# Altium PCB PCB1_on_hydrolib.PcbDoc
Units mil, origin at the board's own origin, x right, y up, seen from the top; angles counter-clockwise.
Board outline 6000 x 4000 mil, 2 copper layers (Top Layer, Bottom Layer); 39 components, 19 nets, 112 pads, 0 vias.
Unrouted connection lines stored in the file: 85.
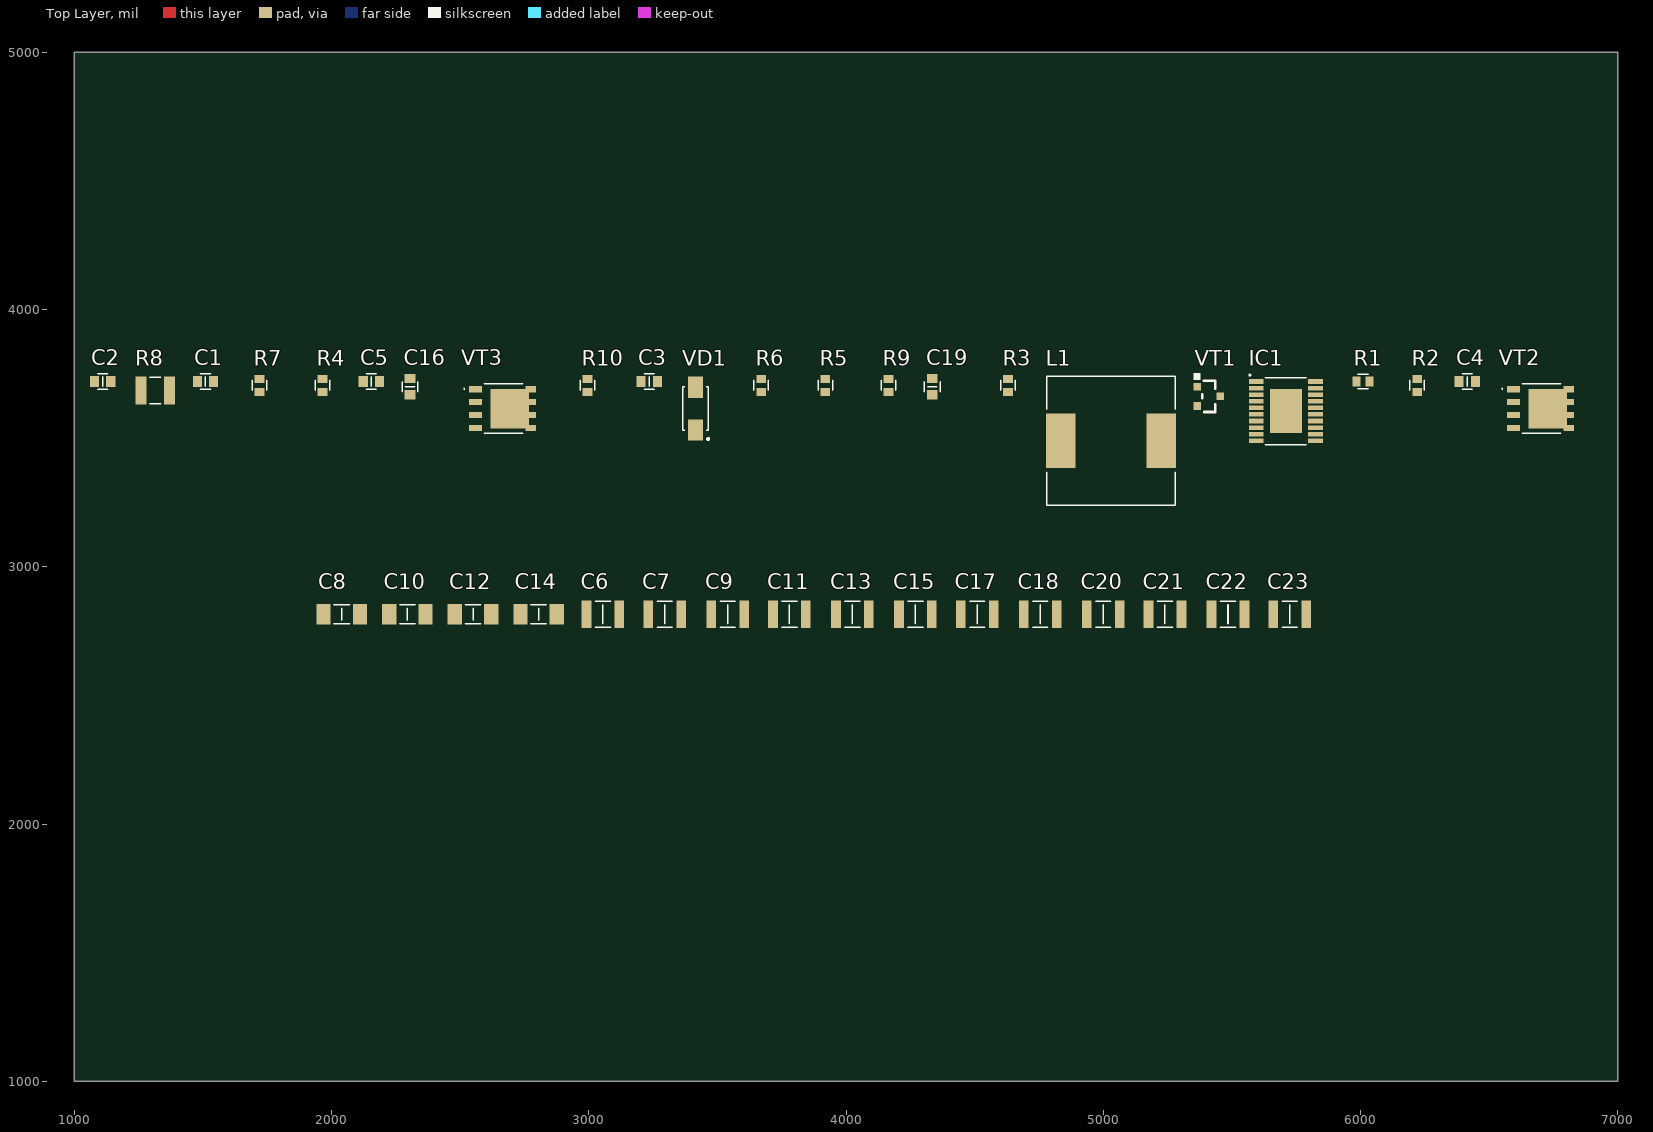
[diagram p0: Top Layer view]
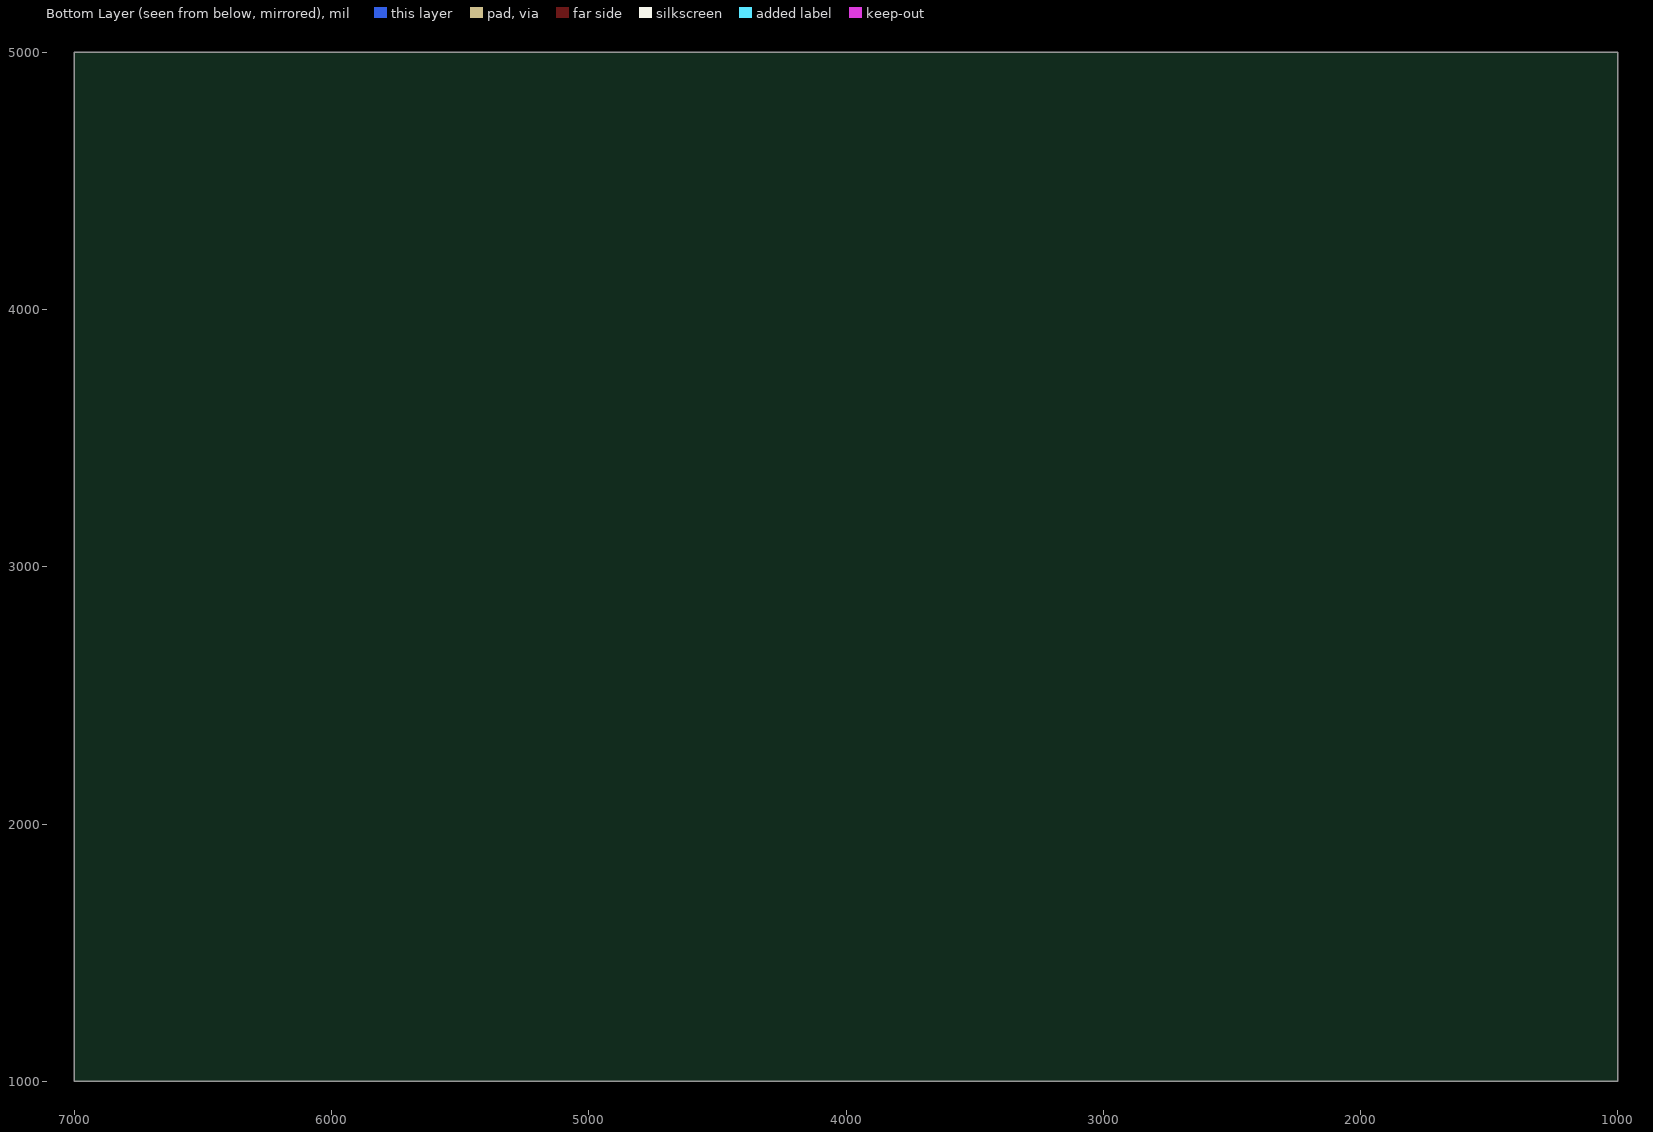
[diagram p1: Bottom Layer view, seen from below]

## Layer stack, top to bottom
Top Solder: solder mask 0.4, Solder Resist, Dk 3.5
Top Layer: signal copper 1.4
Dielectric 1: dielectric 12.6, FR-4, Dk 4.8
Bottom Layer: signal copper 1.4
Bottom Solder: solder mask 0.4, Solder Resist, Dk 3.5

## Board outline
1000,1000 7000,1000 7000,5000 1000,5000

## Design rules (kind name [scope] priority, off if disabled: settings)
Clearance [All] p1: gap=10 ignorepadtopadclearanceinfootprint=FALSE except(0: Arc-Hole Track-Hole SMDPad-Hole THPad-Hole Via-Hole Fill-Hole Poly-Hole Region-Hole Text-Hole)
PolygonConnect [All] p1: connectstyle=Relief reliefconductorwidth=10 reliefentries=4 polygonreliefangle="90 Angle" airgapwidth=10
RoutingVias [All] p1: holewidth=28 width=50 viastyle="Through Hole" minholewidth=28 minwidth=50 maxholewidth=28 maxwidth=50
SolderMaskExpansion [All] p1: expansion=4 istentingtop=FALSE
Width [All] p1: maxlimit=10 minlimit=10 preferedwidth=10
30 further rules are at their usual default settings.

## Components (designator, comment, footprint, x,y, rotation, side; value= is the part's Value field where it differs from the comment)
C1 "Capacitor" 0603C 1510,3720 r0 top value="0,01 н"
C2 "Capacitor" 0603C 1110,3720 r0 top value="0,15 н"
C3 "Capacitor" 0603C 3235,3720 r0 top value="0,75 н"
C4 "Capacitor" 0603C 6415,3720 r0 top value="0,1 мк"
C5 "Capacitor" 0603C 2155,3720 r0 top value="10 н"
C6 "Capacitor" 1210C 3055,2815 r0 top value="22 мк"
C7 "Capacitor" 1210C 3295,2815 r0 top value="22 мк"
C8 "Capacitor" 1206C 2040,2815 r0 top value="2,2 мк"
C9 "Capacitor" 1210C 3540,2815 r0 top value="22 мк"
C10 "Capacitor" 1206C 2295,2815 r0 top value="2,2 мк"
C11 "Capacitor" 1210C 3780,2815 r0 top value="22 мк"
C12 "Capacitor" 1206C 2550,2815 r0 top value="2,2 мк"
C13 "Capacitor" 1210C 4025,2815 r0 top value="22 мк"
C14 "Capacitor" 1206C 2805,2815 r0 top value="2,2 мк"
C15 "Capacitor" 1210C 4270,2815 r0 top value="22 мк"
C16 "Capacitor" 0603C 2305,3700 r90 top value="1 мк"
C17 "Capacitor" 1210C 4510,2815 r0 top value="22 мк"
C18 "Capacitor" 1210C 4755,2815 r0 top value="22 мк"
C19 "Capacitor" 0603C 4335,3700 r90 top value="1 мк"
C20 "Capacitor" 1210C 5000,2815 r0 top value="22 мк"
C21 "Capacitor" 1210C 5240,2815 r0 top value="22 мк"
C22 "Capacitor" 1210C 5485,2815 r0 top value="22 мк"
C23 "Capacitor" 1210C 5725,2815 r0 top value="22 мк"
IC1 "LM5116MH" HTSSOP-20 5710,3605 r0 top
L1 "CDSPRH127-150M" SPRH127 5020,3495 r0 top value="15 мк"
R1 "Resistor" 0603R 6010,3720 r0 top value=N/A
R2 "Resistor" 0603R 6220,3705 r90 top value="33 к"
R3 "Resistor" 0603R 4630,3705 r90 top value="2,7 к"
R4 "Resistor" 0603R 1965,3705 r90 top value="180 к"
R5 "Resistor" 0603R 3920,3705 r90 top value="12,4 к"
R6 "Resistor" 0603R 3670,3705 r90 top value="470 к"
R7 "Resistor" 0603R 1720,3705 r90 top value="10 к"
R8 "Resistor" 1210R 1315,3685 r0 top value="10 м"
R9 "Resistor" 0603R 4165,3705 r90 top value="10,7 к"
R10 "Resistor" 0603R 2995,3705 r90 top value="1,21 к"
VD1 "ES1D-E3/61T" SMA 3415,3615 r90 top
VT1 "PDTC114ET" SOT23-3 5365,3700 r0 top
VT2 "SIR426DP-T1-GE3" PowerPAK_SO-8 6695,3615 r0 top
VT3 "SIR426DP-T1-GE3" PowerPAK_SO-8 2660,3615 r0 top

## Footprints (in the part's own frame and the unit in brackets; to place one, negate y for a bottom-side part, rotate by r counter-clockwise, add the part's x,y. Pads: shape width x height; smd on the part's side, far side on the other; paste and mask are expansions set on the pad)
0603C [mm] "Chip Resistor, 2-Leads, Body 1,40x0,80mm, IPC Medium Density"
  rect 0.9x1.05 smd: 1(-0.8,0) 2(0.8,0)
  silkscreen extent -0.5,-0.77 0.5,0.77, body extent -0.85,-0.45 0.85,0.45, height 0.9
0603R [mm] "Chip Resistor, 2-Leads, Body 1.60x0.85mm, IPC Medium Density"
  rect 0.8x0.95 smd: 1(-0.65,0) 2(0.65,0)
  silkscreen extent -0.5,-0.72 0.5,0.72, body extent -0.87,-0.47 0.88,0.48, height 0.9
1206C [mm]
  rect 1.4x2 smd paste+0: 1(-1.8,0) 2(1.8,0)
  silkscreen extent -0.77,-0.92 0.77,0.92, body extent -1.6,-0.74 1.6,0.86, height 1.59
1210C [mm]
  rect 0.954x2.706 smd paste+0: 1(-1.625,0) 2(1.625,0)
  silkscreen extent -0.75,-1.28 0.75,1.28, body extent -2.35,-1.6 2.35,1.6, height 0.25
1210R [mm]
  rect 1.1x2.77 smd: 1(-1.413,0) 2(1.413,0)
  silkscreen extent -0.55,-1.3 0.55,1.3, body extent -1.55,-1.3 1.55,1.3, height 0.65
HTSSOP-20 [mm]
  rect 1.45x0.45 smd: 1(-2.925,2.925) 2(-2.925,2.275) 3(-2.925,1.625) 4(-2.925,0.975) 5(-2.925,0.325) 6(-2.925,-0.325) 7(-2.925,-0.975) 8(-2.925,-1.625) 9(-2.925,-2.275) 10(-2.925,-2.925) 11(2.925,-2.925) 12(2.925,-2.275) 13(2.925,-1.625) 14(2.925,-0.975) 15(2.925,-0.325) 16(2.925,0.325) 17(2.925,0.975) 18(2.925,1.625) 19(2.925,2.275) 20(2.925,2.925)
  rect 3.15x4.35 smd: 21(0,0)
  silkscreen extent -3.61,-3.3 2.03,3.61, body extent -3.21,-3.25 3.21,3.25, height 1
PowerPAK_SO-8 [mm]
  rect 1.27x0.61 smd: 1(-2.543,1.905) 2(-2.543,0.635) 3(-2.543,-0.635) 4(-2.543,-1.905)
  rect 1.02x0.61 smd: 5(2.921,-1.905) 8(2.921,1.905)
  rect 0.71x0.61 smd: 6(3.077,-0.635) 7(3.077,0.635)
  rect 3.81x3.91 smd: 9(0.83,0)
  silkscreen extent -3.72,-2.45 2.13,2.45, body extent -2.95,-2.58 3.2,2.58, height 1.12
SMA [mm]
  rect 2.12x1.5 smd: 1(2.115,0) 2(-2.115,0)
  silkscreen extent -3.1,-1.35 2.16,1.28, body extent -2.57,-1.28 2.57,1.28, height 2.5
SOT23-3 [mil]
  rect 30x30 smd: 1(0,0) 2(0,-75) 3(90,-37.5)
  silkscreen extent -13,-98 70,52, body extent -4,-97 94,21, height 41
SPRH127 [mm]
  rect 2.9x5.4 smd: 1(-4.696,-0.127) 2(5.204,-0.127)
  silkscreen extent -6.1,-6.48 6.6,6.22, body extent -5.75,-6.13 6.25,5.87, height 8.05

## Part data
C1: library part Capacitor_0,01n_10_50V_X7R_0603C, "Конденсатор", Capacity (nF)=0,01, Dielectric=X7R, Tolerance=0,1, Voltage (V)=50, Library Path2=Schematic\Capacitor.SchLib, Part Number=Capacitor_0,01n_10_50V_X7R_0603C
C2: library part Capacitor_0,15n_10_50V_X7R_0603C, "Конденсатор", Capacity (nF)=0,15, Dielectric=X7R, Tolerance=0,1, Voltage (V)=50, Library Path2=Schematic\Capacitor.SchLib, Part Number=Capacitor_0,15n_10_50V_X7R_0603C
C3: library part Capacitor_0,75n_10_50V_X7R_0603C, "Конденсатор", Capacity (nF)=0,75, Dielectric=X7R, Tolerance=0,1, Voltage (V)=50, Library Path2=Schematic\Capacitor.SchLib, Part Number=Capacitor_0,75n_10_50V_X7R_0603C
C4: library part Capacitor_0,1u_10_50V_X7R_0603C, "Конденсатор", Capacity (nF)=100, Dielectric=X7R, Tolerance=0,1, Voltage (V)=50, Library Path2=Schematic\Capacitor.SchLib, Part Number=Capacitor_0,1u_10_50V_X7R_0603C
C5: library part Capacitor_10n_10_50V_X7R_0603C, "Конденсатор", Capacity (nF)=10, Dielectric=X7R, Tolerance=0,1, Voltage (V)=50, Library Path2=Schematic\Capacitor.SchLib, Part Number=Capacitor_10n_10_50V_X7R_0603C
C6 C7 C9 C11 C13 C15 C17 C18 C20 C21 C22 C23: library part Capacitor_22u_10_25V_X7R_1210C, "Конденсатор", Capacity (nF)=22000, Dielectric=X7R, Tolerance=0,1, Voltage (V)=25, Library Path2=Schematic\Capacitor.SchLib, Part Number=Capacitor_22u_10_25V_X7R_1210C
C8 C10 C12 C14: library part Capacitor_2,2u_10_50V_X7R_1206C, "Конденсатор", Capacity (nF)=2200, Dielectric=X7R, Tolerance=0,1, Voltage (V)=50, Library Path2=Schematic\Capacitor.SchLib, Part Number=Capacitor_2,2u_10_50V_X7R_1206C
C16 C19: library part Capacitor_1u_10_50V_X7R_0603C, "Конденсатор", Capacity (nF)=1000, Dielectric=X7R, Tolerance=0,1, Voltage (V)=50, Library Path2=Schematic\Capacitor.SchLib, Part Number=Capacitor_1u_10_50V_X7R_0603C
IC1: "dc-dc понижающий adj 6-100v", Manufacturer_Part_Number=LM5116MH/NOPB, Part Number=LM5116MH
L1: "Индуктивность на 15 мкГн, номинальный ток 8,4 А", Current (A)=8,4, Inductance (μH)=15, Part Number=CDSPRH127-150M
R1: library part res_0603_N/A, "посадочное место 0603 под перемычку", Tolerance=1%, Part Number=res_0603_N/A
R2: library part Resistor_33k_1_0603, "Резистор номиналом 33 кОм и точностью 1%", Tolerance=1%, Part Number=Resistor_33k_1_0603
R3: library part Resistor_2.7k_1_0603, "Резистор номиналом 2,7 кОм и точностью 1%", Tolerance=1%, Part Number=Resistor_2.7k_1_0603
R4: library part Resistor_180k_1_0603, "Резистор номиналом 180 кОм и точностью 1%", Tolerance=1%, Part Number=Resistor_180k_1_0603
R5: library part Resistor_12.4k_1_0603, "Резистор номиналом 12,4 кОм и точностью 1%", Tolerance=1%, Part Number=Resistor_12.4k_1_0603
R6: library part Resistor_470k_1_0603, "Резистор номиналом 470 кОм и точностью 1%", Tolerance=1%, Part Number=Resistor_470k_1_0603
R7: library part Resistor_10k_1_0603, "Резистор номиналом 10 кОм и точностью 1%", Tolerance=1%, Part Number=Resistor_10k_1_0603
R8: library part RL1210FR-070R01L, "Резистор номиналом 10 мОм, точностью 1%, 0.5Вт", Tolerance=1%, Part Number=RL1210FR-070R01L
R9: library part Resistor_10.7k_1_0603, "Резистор номиналом 10,7 кОм и точностью 1%", Tolerance=1%, Part Number=Resistor_10.7k_1_0603
R10: library part Resistor_1.21k_1_0603, "Резистор номиналом 1,21 кОм и точностью 1%", Tolerance=1%, Part Number=Resistor_1.21k_1_0603
VD1: "Диод 1A 200V", Current (A)=1, Repetitive peak reverse voltage (Vrrm)=200, Part Number=ES1D-E3/61T
VT1: "цифровой npn 50в 100мА", Part Number=PDTC114ET, Напряжение С-И/К-Э="50 В", Ток макс#="0, 1 А"
VT2 VT3: "Транзистор полевой MOSFET N-канальный 40В 41.7Вт", Part Number=SIR426DP-T1-GE3, Напряжение С-И/К-Э="40 В"

## Nets (pads, with @x,y where several pads share a name; then routed paths per layer and width w, separated by ;. In a path a pad name is that pad's centre, name@x,y a point inside that pad or via, vN(x,y) a via of type N, cw(c..) or ccw(c..) an arc to the next point about the centre after c; other vN are vias at no path point)
FB: C1.2 IC1.8 R4.2 R9.1 R10.2
GND: C3.1 C4.1 C5.1 C6.1 C7.1 C8.1 C9.1 C10.1 C11.1 C12.1 C13.1 C14.1 C15.1 C16.2 C17.1 C18.1 C20.1 C21.1 C22.1 C23.1 IC1.6 IC1.12 IC1.14 IC1.17 IC1.21 R3.1 R5.1 R7.2 R8.1 R10.1 VT1.2
NetC1_1: C1.1 C2.1 IC1.9
NetC2_2: C2.2 R4.1
NetC5_2: C5.2 IC1.7
NetC16_1: C16.1 IC1.16 R6.1 VD1.1
NetC19_1: C19.1 IC1.18 VD1.2
NetC19_2: C19.2 IC1.20 L1.1
NetIC1_2: IC1.2 R1.2 R2.1 R3.2 VT1.3
NetIC1_3: IC1.3 R5.2
NetIC1_11: IC1.11 R7.1
NetIC1_13: IC1.13 R8.2 VT3.1 VT3.2 VT3.3
NetIC1_15: IC1.15 VT3.4
NetIC1_19: IC1.19 VT2.4
NetR1_1: R1.1 VT1.1
NetVT2_1: VT2.1 VT2.2 VT2.3 VT3.5 VT3.6 VT3.7 VT3.8 VT3.9
RAMP: C3.2 IC1.5 R6.2
Vin: C4.2 C8.2 C10.2 C12.2 C14.2 IC1.1 IC1.4 R2.2 VT2.5 VT2.6 VT2.7 VT2.8 VT2.9
Vout: C6.2 C7.2 C9.2 C11.2 C13.2 C15.2 C17.2 C18.2 C20.2 C21.2 C22.2 C23.2 IC1.10 L1.2 R9.2